# EAGLE board PL9823-breakout-board (EAGLE 6.5.0)
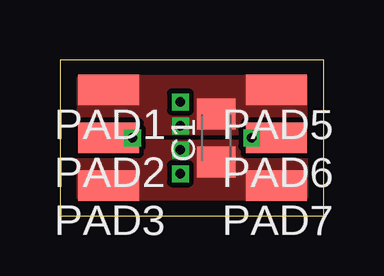
[diagram p0: board, top side]
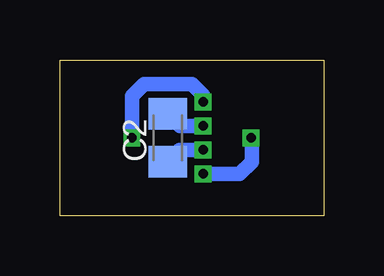
[diagram p1: board, bottom side, seen from below]

Size 11 x 6.5 mm. Coordinates in mm from the lower left corner, seen from the top.
Outline: 0,0 11,0 11,6.5 0,6.5 0,0
Copper layers (1*16): Top 0.035mm / dielectric 1.5mm / Bottom 0.035mm
Design rules "smart-prototyping": minimum track width 7mil, minimum drill 12mil, track to track 7mil, track to pad 7mil, pad to pad 7mil, via to via 7mil, smd to smd 0mil, copper to edge 20mil, drill to drill 10mil, minimum pad ring 10mil, minimum via ring 6mil, stop-mask expansion 2mil, vias tented up to drill 25mil, thermal gap 10mil
Net classes: 0 default: clearance 0.205 mm

## Footprints (pad centres in the part's own frame; a part is rotated, then mirrored left to right if it is on the bottom)
C0805K = smd 1.3 x 1.6: 1 -1,0; 2 1,0
SMD1,27-2,54 = smd 1.27 x 2.54: 1 0,0

## Placement (x,y rotation side)
C1  100nF  [C0805K]  6.52,3.24 90 top
C2  100nF  [C0805K]  6.5,3.25 90 bottom
PAD1  WIREPADSMD1,27-254  [SMD1,27-2,54]  2.02,5.24 90 top
PAD2  WIREPADSMD1,27-254  [SMD1,27-2,54]  2.02,3.24 90 top
PAD3  WIREPADSMD1,27-254  [SMD1,27-2,54]  2.02,1.24 90 top
PAD5  WIREPADSMD1,27-254  [SMD1,27-2,54]  9.02,5.24 90 top
PAD6  WIREPADSMD1,27-254  [SMD1,27-2,54]  9.02,3.24 90 top
PAD7  WIREPADSMD1,27-254  [SMD1,27-2,54]  9.02,1.24 90 top

## Library data of the parts
C1 C2 = rcl
PAD1-PAD3 PAD5-PAD7 = wirepad

## Nets
+: C1.1 C2.1 PAD3.1 PAD7.1
-: C1.2 C2.2 PAD1.1 PAD5.1
DI: PAD2.1
DO: PAD6.1

## Tracks (layer width: path | path; a pad name or v marks a point on that pad's centre or on a via)
+  (via drill 0.4)
  Bottom 0.61: C2.1 6.01,2.74 v5.02,2.74
  pour Top (isolate 0.2, no thermals): 0.82,3.04 10.22,3.04 10.22,0.74 0.82,0.74
-  (via drill 0.4)
  Bottom 0.61: C2.2 5.99,3.74 v5.02,3.74
  pour Top (isolate 0.2, rank 2, no thermals): 0.82,3.44 10.22,3.44 10.22,5.74 0.82,5.74
DI  (via drill 0.4)
  Top 0.406: v3.02,3.24 PAD2.1
  Bottom 0.61: v5.02,1.74 3.51,1.74 3,2.25 3,3.22 v3.02,3.24
DO  (via drill 0.4)
  Top 0.406: 8.5,3.24 PAD6.1
  Top 0.61: v8,3.25 v8,3.24 8.5,3.24
  Bottom 0.61: v5.02,4.74 5.02,5.02 5.5,5.5 7.5,5.5 8,5 v8,3.24

## Text on the board
tDocu: LONG | - | DI | DO | * | +
bDocu: long | *short